# EAGLE board connectionDiagramReceiverBoard (EAGLE 7.7.0)
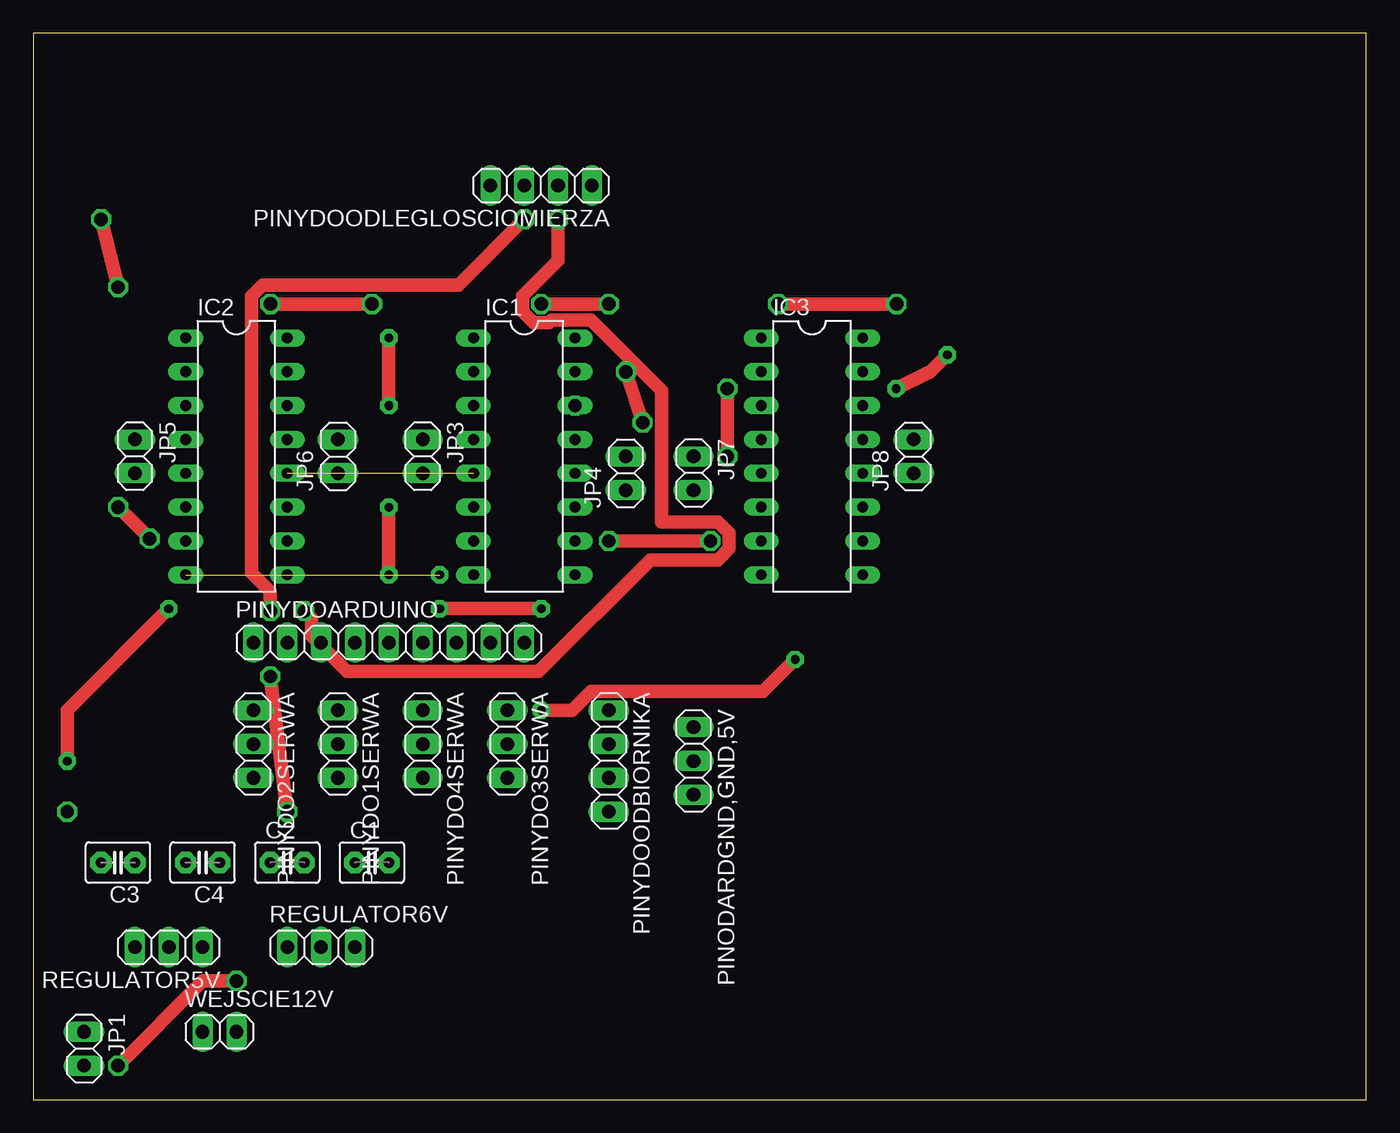
[diagram p0: board, top side]
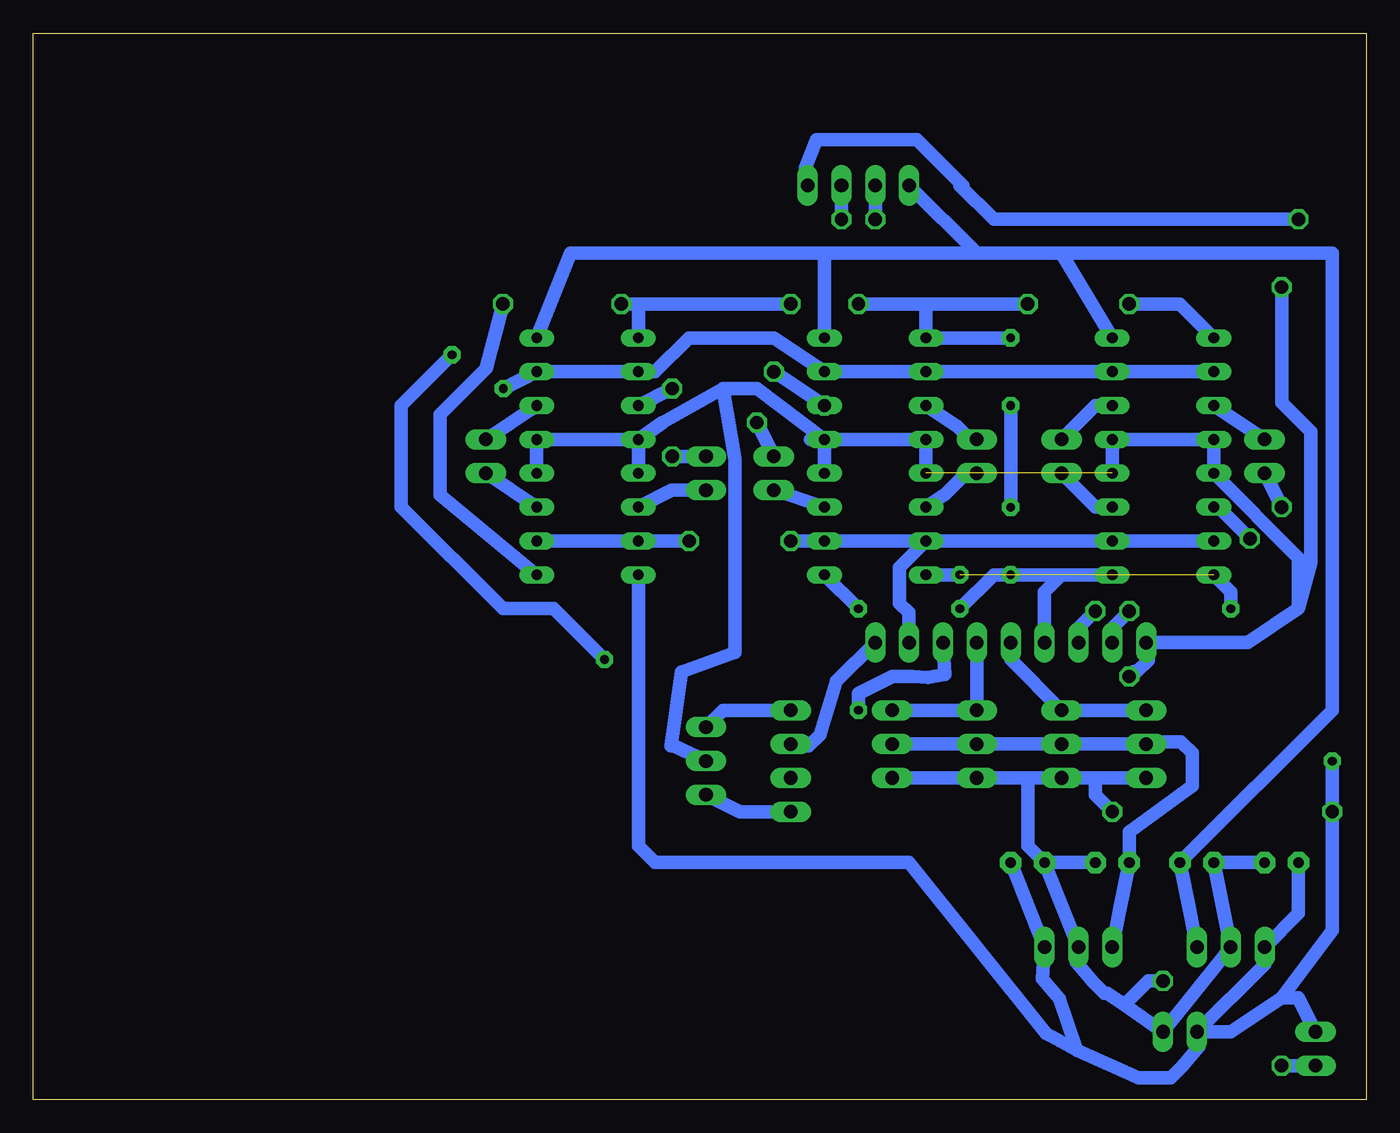
[diagram p1: board, bottom side, seen from below]

Size 100 x 80 mm. Coordinates in mm from the lower left corner, seen from the top.
Outline: 0,0 100,0 100,80 0,80 0,0
Copper layers (1*16): Top 0.035mm / dielectric 1.5mm / Bottom 0.035mm
Design rules "default": minimum track width 6mil, minimum drill 0.35mm, track to track 6mil, track to pad 6mil, pad to pad 6mil, via to via 6mil, smd to smd 6mil, copper to edge 40mil, drill to drill 6mil, minimum pad ring 10mil, minimum via ring 8mil, stop-mask expansion 4mil, vias tented up to drill 0mil, thermal gap 10mil

## Footprints (pad centres in the part's own frame; a part is rotated, then mirrored left to right if it is on the bottom)
C2.5-3 = drill 0.813 pad 1.6 octagon: 1 -1.27,0; 2 1.27,0
DIL16 = drill 0.813 long: 1 -8.89,-3.81; 2 -6.35,-3.81; 3 -3.81,-3.81; 4 -1.27,-3.81; 5 1.27,-3.81; 6 3.81,-3.81; 7 6.35,-3.81; 8 8.89,-3.81; 9 8.89,3.81; 10 6.35,3.81; 11 3.81,3.81; 12 1.27,3.81; 13 -1.27,3.81; 14 -3.81,3.81; 15 -6.35,3.81; 16 -8.89,3.81
1X02 = drill 1.016 long: 1 -1.27,0; 2 1.27,0
1X03 = drill 1.016 long: 1 -2.54,0; 2 0,0; 3 2.54,0
1X09 = drill 1.016 long: 1 -10.16,0; 2 -7.62,0; 3 -5.08,0; 4 -2.54,0; 5 0,0; 6 2.54,0; 7 5.08,0; 8 7.62,0; 9 10.16,0
1X04 = drill 1.016 long: 1 -3.81,0; 2 -1.27,0; 3 1.27,0; 4 3.81,0

## Placement (x,y rotation side)
C1  [C2.5-3]  25.4,17.78 0 top
C2  [C2.5-3]  19.05,17.78 0 top
C3  [C2.5-3]  6.35,17.78 180 top
C4  [C2.5-3]  12.7,17.78 180 top
IC1  L293D  [DIL16]  36.83,48.26 270 top
IC2  L293D  [DIL16]  15.24,48.26 270 top
IC3  L293D  [DIL16]  58.42,48.26 270 top
JP1  [1X02]  3.81,3.81 270 top
JP3  [1X02]  29.21,48.26 270 top
JP4  [1X02]  44.45,46.99 90 top
JP5  [1X02]  7.62,48.26 270 top
JP6  [1X02]  22.86,48.26 90 top
JP7  [1X02]  49.53,46.99 270 top
JP8  [1X02]  66.04,48.26 90 top
PINODARDGND,GND,5V  [1X03]  49.53,25.4 270 top
PINYDO1SERWA  [1X03]  22.86,26.67 270 top
PINYDO2SERWA  [1X03]  16.51,26.67 270 top
PINYDO3SERWA  [1X03]  35.56,26.67 270 top
PINYDO4SERWA  [1X03]  29.21,26.67 270 top
PINYDOARDUINO  [1X09]  26.67,34.29 0 top
PINYDOODBIORNIKA  [1X04]  43.18,25.4 270 top
PINYDOODLEGLOSCIOMIERZA  [1X04]  38.1,68.58 180 top
REGULATOR5V  [1X03]  10.16,11.43 180 top
REGULATOR6V  [1X03]  21.59,11.43 0 top
WEJSCIE12V  [1X02]  13.97,5.08 0 top

## Library data of the parts
C1-C4 = capacitor-wima
IC1-IC3 = st-microelectronics; MPN: L293D; OC_FARNELL: 9589619; OC_NEWARK: 56P8249
JP1 JP3-JP8 PINODARDGND,GND,5V PINYDO1SERWA PINYDO2SERWA PINYDO3SERWA PINYDO4SERWA PINYDOARDUINO PINYDOODBIORNIKA PINYDOODLEGLOSCIOMIERZA REGULATOR5V REGULATOR6V WEJSCIE12V = pinhead

## Nets
GND: C1.1 C2.2 C3.1 C4.2 IC1.4 IC1.5 IC1.12 IC1.13 IC2.4 IC2.5 IC2.12 IC2.13 IC3.4 IC3.5 IC3.12 IC3.13 JP1.2 PINODARDGND,GND,5V.2 PINYDO1SERWA.3 PINYDO2SERWA.3 PINYDO3SERWA.3 PINYDO4SERWA.3 PINYDOARDUINO.1 PINYDOODLEGLOSCIOMIERZA.1 REGULATOR5V.2 REGULATOR6V.2 WEJSCIE12V.2
N$1: C1.2 C3.2 IC1.8 IC2.8 IC3.8 JP1.1 REGULATOR5V.3 REGULATOR6V.3 WEJSCIE12V.1
N$3: C2.1 PINYDO1SERWA.2 PINYDO2SERWA.2 PINYDO3SERWA.2 PINYDO4SERWA.2 REGULATOR6V.1
N$4: C4.1 IC1.16 IC2.16 IC3.16 PINYDOODLEGLOSCIOMIERZA.4 REGULATOR5V.1
N$5: IC1.14 JP4.2
N$6: IC1.11 JP4.1
N$7: IC1.6 JP3.2
N$8: IC1.3 JP3.1
N$9: IC2.3 JP5.1
N$10: IC2.6 JP5.2
N$11: IC2.14 JP6.2
N$12: IC2.11 JP6.1
N$13: IC3.3 JP7.1
N$14: IC3.6 JP7.2
N$15: IC3.14 JP8.2
N$16: IC3.11 JP8.1
N$17: PINODARDGND,GND,5V.1 PINYDOODBIORNIKA.1
N$18: PINODARDGND,GND,5V.3 PINYDOODBIORNIKA.4
N$19: PINYDOARDUINO.3 PINYDOODLEGLOSCIOMIERZA.2
N$20: PINYDOARDUINO.2 PINYDOODLEGLOSCIOMIERZA.3
N$21: IC1.1 IC1.9 IC2.1 IC2.9 IC3.1 IC3.9 PINYDOARDUINO.4
N$23: IC1.7 IC1.10 IC2.7 IC2.10 IC3.7 IC3.10 PINYDOARDUINO.8
N$24: IC1.2 IC1.15 IC2.2 IC2.15 IC3.2 IC3.15 PINYDOARDUINO.7
N$25: PINYDO1SERWA.1 PINYDO2SERWA.1 PINYDOARDUINO.5
N$26: PINYDOARDUINO.9 PINYDOODBIORNIKA.2
N$27: PINYDO3SERWA.1 PINYDO4SERWA.1 PINYDOARDUINO.6

## Tracks (layer width: path | path; a pad name or v marks a point on that pad's centre or on a via)
GND  (via drill 1, 1 pad 1.3)  (1 unrouted)
  Top 1.016: v17.78,31.75 v19.05,21.59 | v5.08,66.04 v6.35,60.96 | v6.35,2.54 12.7,8.89 v15.24,8.89
  Bottom 1.016: IC1.5 IC1.4 IC1.13 | IC1.13 IC1.12 | IC3.4 IC3.5 | IC3.4 IC3.13 IC3.12 | IC2.12 IC2.13 IC2.4 IC2.5 5.08,40.64 5.08,36.83 | C1.1 REGULATOR6V.2 21.74,10.31 20.47,8.81 19.64,7.98 19.41,7.98 18.14,7.1 | 18.14,7.1 WEJSCIE12V.2 13.51,7.25 REGULATOR5V.2 C4.2 C3.1 | C1.1 C2.2 | PINYDO2SERWA.3 20.32,24.13 | 20.32,24.13 PINYDO1SERWA.3 25.4,24.13 | 25.4,24.13 PINYDO4SERWA.3 PINYDO3SERWA.3 | C1.1 25.4,19.05 25.4,24.13 | PINODARDGND,GND,5V.2 51.92,26.52 52.15,26.52 51.36,32.08 47.35,33.55 47.35,48.07 48.26,53.34 | IC3.4 52.8,50.8 48.26,53.34 | IC1.13 41.68,49.53 | v17.78,31.75 17.42,32.11 17.19,32.11 16.36,32.94 16.36,34.44 PINYDOARDUINO.1 8.89,34.29 5.08,36.83 | v19.05,21.59 20.32,22.86 20.32,24.13 | PINYDOODLEGLOSCIOMIERZA.1 42.06,69.7 42.06,69.93 41.23,72.03 33.7,72.03 30.25,68.58 30.48,68.58 27.94,66.04 v5.08,66.04 | v6.35,60.96 6.35,52.3 4.17,50.12 4.17,40.28 5.08,36.83 | IC1.13 45.72,53.34 48.26,53.34 | JP1.2 v6.35,2.54 | v15.24,8.89 16.35,8.89 18.14,7.1
N$1  (via drill 0.35, 0.65 pad 1.3, 1)  (1 unrouted)
  Top 1.016: v10.16,36.83 2.54,29.21 v2.54,25.4
  Bottom 1.016: C3.2 5.08,13.97 REGULATOR5V.3 7.62,10.16 WEJSCIE12V.1 | C1.2 REGULATOR6V.3 24.28,9.04 23.01,7.54 21.71,3.69 | WEJSCIE12V.1 12.55,3.96 13.82,2.46 14.65,1.63 17.1,1.63 21.71,3.69 | 21.71,3.69 24.01,4.96 34.29,17.78 53.34,17.78 54.61,19.05 IC3.8 | 6.35,7.62 2.54,12.7 v2.54,21.59 v2.54,25.4 | 6.35,7.62 10.16,5.08 WEJSCIE12V.1 | IC1.8 v30.48,39.37 | IC2.8 10.16,38.1 v10.16,36.83 | JP1.1 5.08,7.62 6.35,7.62
  other vias: 3.81,5.08
N$3
  Bottom 1.016: REGULATOR6V.1 18.51,14.12 C2.1 17.78,20.09 13.06,23.54 13.06,25.99 13.89,26.82 15.39,26.82 PINYDO2SERWA.2 PINYDO1SERWA.2 PINYDO4SERWA.2 PINYDO3SERWA.2
N$4
  Bottom 1.016: IC2.16 22.86,63.5 | 22.86,63.5 29.21,63.5 | 29.21,63.5 40.64,63.5 | 40.64,63.5 59.69,63.5 IC3.16 | IC1.16 40.64,63.5 | REGULATOR5V.1 13.24,14.12 C4.1 2.54,29.21 2.54,63.5 22.86,63.5 | PINYDOODLEGLOSCIOMIERZA.4 29.21,63.5
N$5  (via drill 1)
  Top 1.016: v44.45,54.61 v45.72,50.8
  Bottom 1.016: IC1.14 v44.45,54.61 | v45.72,50.8 JP4.2
  other vias: 40.64,52.07
N$6
  Bottom 1.016: JP4.1 IC1.11
N$7
  Bottom 1.016: IC1.6 31.55,45.43 29.99,46.99 JP3.2
N$8
  Bottom 1.016: IC1.3 30.68,50.51 29.7,49.53 JP3.1
N$9
  Bottom 1.016: JP5.1 IC2.3
N$10  (via drill 1)
  Top 1.016: v6.35,44.45 v8.72,42.08
  Bottom 1.016: JP5.2 v6.35,44.45 | v8.72,42.08 11.1,44.45 IC2.6
N$11
  Bottom 1.016: JP6.2 20.32,52.07 IC2.14
N$12
  Bottom 1.016: JP6.1 20.32,44.45 IC2.11
N$13  (via drill 1)
  Top 1.016: v52.07,53.34 v52.07,48.26
  Bottom 1.016: IC3.3 v52.07,53.34 | v52.07,48.26 JP7.1
N$14
  Bottom 1.016: IC3.6 52.07,45.72 JP7.2
N$15
  Bottom 1.016: IC3.14 JP8.2
N$16
  Bottom 1.016: JP8.1 IC3.11
N$17
  Bottom 1.016: PINYDOODBIORNIKA.1 48.26,29.21 PINODARDGND,GND,5V.1
N$18
  Bottom 1.016: PINODARDGND,GND,5V.3 46.99,21.59 PINYDOODBIORNIKA.4
N$19  (via drill 1)
  Top 1.016: v39.37,66.04 39.37,62.95 36.69,60.27 36.69,59.11 37.52,58.28 38.68,58.28 38.88,58.47 41.85,58.47 47.13,53.19 47.13,43.32 51.38,43.32 52.21,42.49 52.21,41.33 51.38,40.5 46.3,40.5 37.91,32.11 23.54,32.11 20.86,34.78 20.86,36.09 v20.32,36.64
  Bottom 1.016: PINYDOODLEGLOSCIOMIERZA.2 v39.37,66.04 | v20.32,36.64 21.59,35.37 PINYDOARDUINO.3
N$20  (via drill 1)
  Top 1.016: v17.78,36.64 17.78,38.11 16.37,39.52 16.37,60.27 17.2,61.1 31.89,61.1 v36.83,66.04
  Bottom 1.016: PINYDOODLEGLOSCIOMIERZA.3 v36.83,66.04 | v17.78,36.64 19.05,35.37 PINYDOARDUINO.2
N$21  (via drill 0.65 pad 1.3, 1)
  Top 1.016: v17.78,59.69 v25.4,59.69 | v38.1,59.69 v43.18,59.69 | v64.77,59.69 v55.88,59.69 | v26.67,57.15 v26.67,52.07 | v26.67,44.45 v26.67,39.37 | v30.48,36.83 v38.1,36.83
  Bottom 1.016: IC2.1 13.97,59.69 v17.78,59.69 | v25.4,59.69 33.02,59.69 | 33.02,59.69 IC1.1 v26.67,57.15 | 33.02,59.69 v38.1,59.69 | v43.18,59.69 54.61,59.69 | 54.61,59.69 IC3.1 | v64.77,59.69 66.04,54.84 69.49,51.39 69.49,45.36 IC3.9 | v55.88,59.69 54.61,59.69 | IC2.9 22.86,39.37 | 22.86,39.37 24.13,38.1 PINYDOARDUINO.4 | v26.67,52.07 v26.67,44.45 | 22.86,39.37 v26.67,39.37 27.94,39.37 v30.48,36.83 | v38.1,36.83 IC1.9
N$23  (via drill 0.35, 1)
  Top 1.016: v43.18,41.91 v50.8,41.91
  Bottom 1.016: IC2.7 IC2.10 IC1.7 | IC1.7 IC1.10 v43.18,41.91 | v50.8,41.91 IC3.7 IC3.10 | IC1.7 33.02,41.9 35,39.92 35,37.24 34.29,36.52 PINYDOARDUINO.8
  other vias: 19.05,41.91
N$24  (via drill 0.65 pad 1.3)
  Top 1.016: v38.1,29.21 40.41,29.21 41.83,30.63 54.76,30.63 v57.15,33.02 | v68.58,55.88 67.31,54.61 v64.73,53.34
  Bottom 1.016: IC2.15 21.59,54.61 | IC2.2 IC2.15 | IC2.15 IC1.2 IC1.15 44.45,57.15 50.8,57.15 53.34,54.61 IC3.2 IC3.15 v64.73,53.34 | PINYDOARDUINO.7 31.6,31.9 32.87,31.67 34.06,31.75 35.56,31.75 38.1,30.48 v38.1,29.21 | v57.15,33.02 60.96,36.83 64.77,36.83 72.39,44.45 72.39,52.07 v68.58,55.88
N$25
  Bottom 1.016: PINYDO2SERWA.1 PINYDO1SERWA.1 26.67,33.02 PINYDOARDUINO.5
N$26
  Bottom 1.016: PINYDOARDUINO.9 39.73,31.39 41,27.35 41.83,26.52 43.33,26.52 PINYDOODBIORNIKA.2
N$27
  Bottom 1.016: PINYDOARDUINO.6 PINYDO4SERWA.1 PINYDO3SERWA.1